# Altium PCB Ryu-Mount.PcbDoc
Units mil, origin at the board's own origin, x right, y up, seen from the top; angles counter-clockwise.
Board outline 6020 x 4528.86 mil, 2 copper layers (Top Layer, Bottom Layer); 5 components, 0 nets, 5 pads, 0 vias.
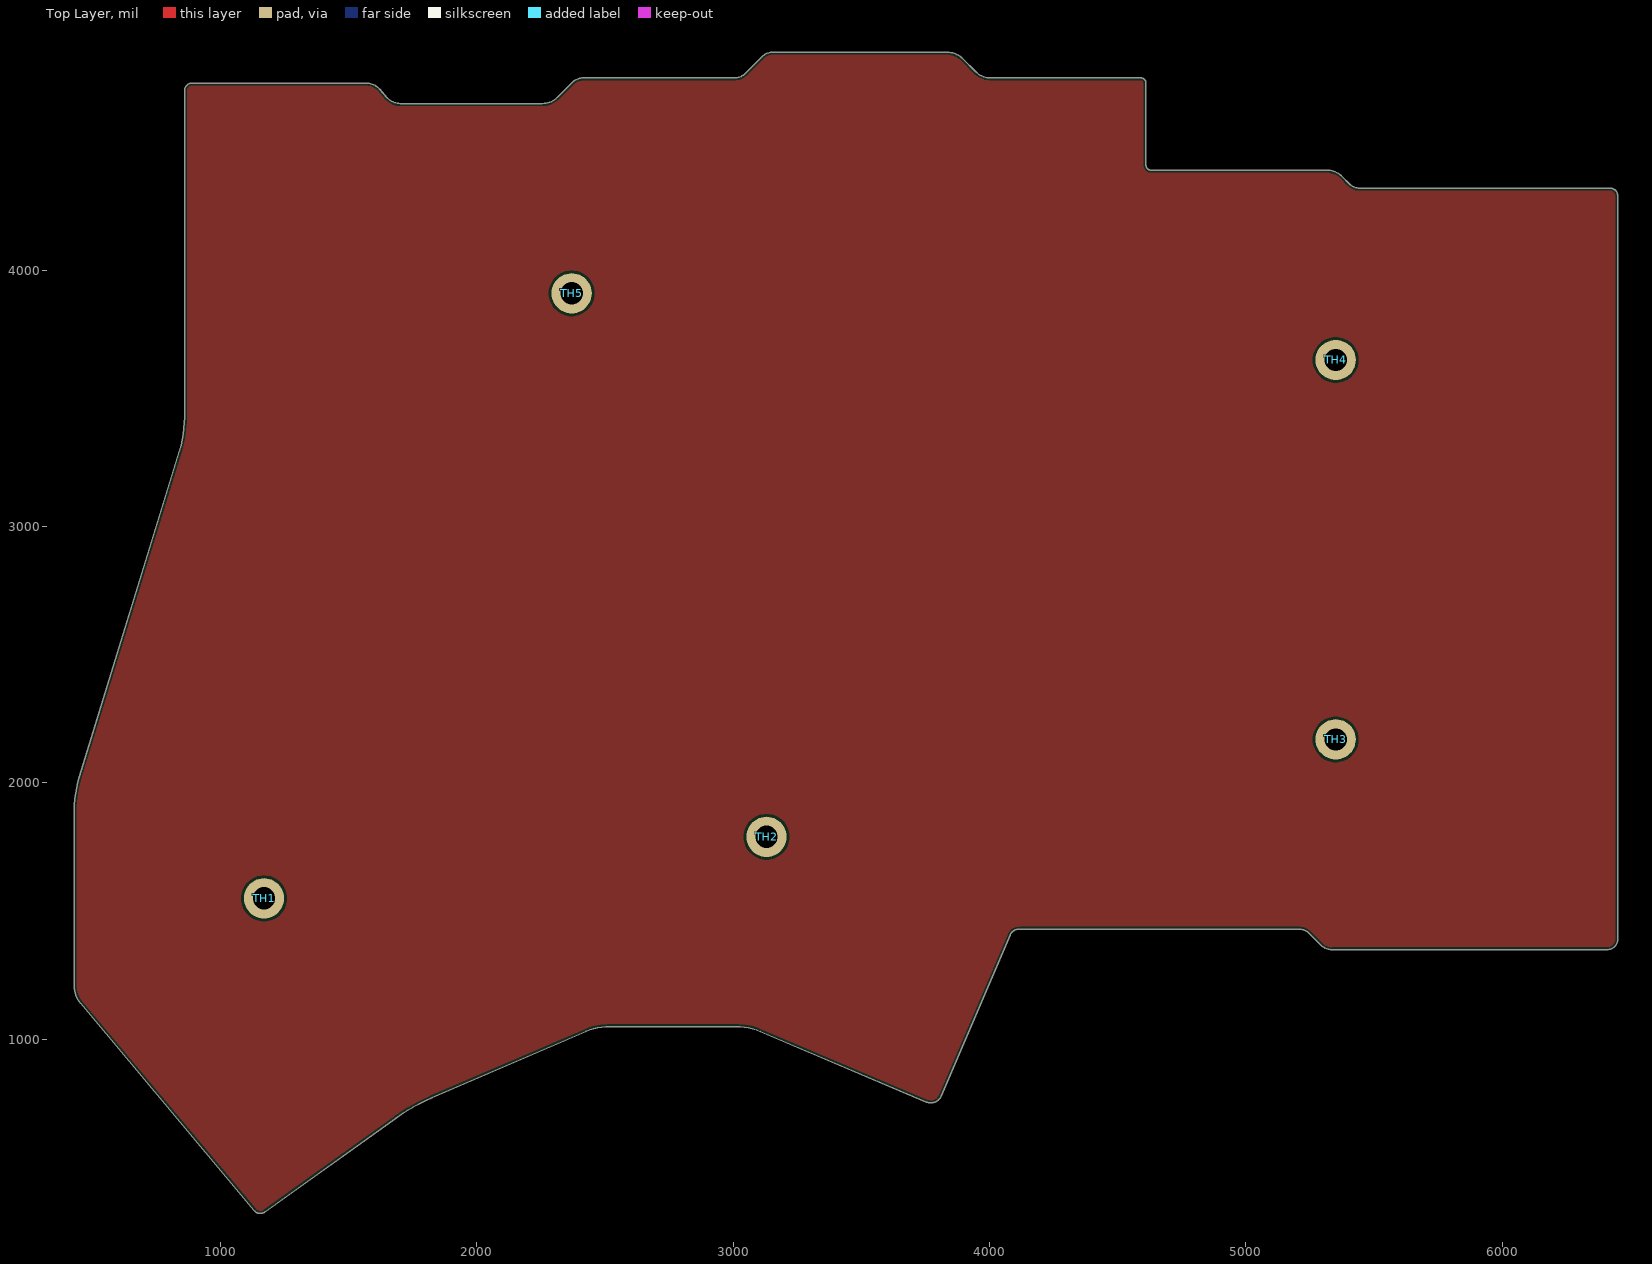
[diagram p0: Top Layer view]
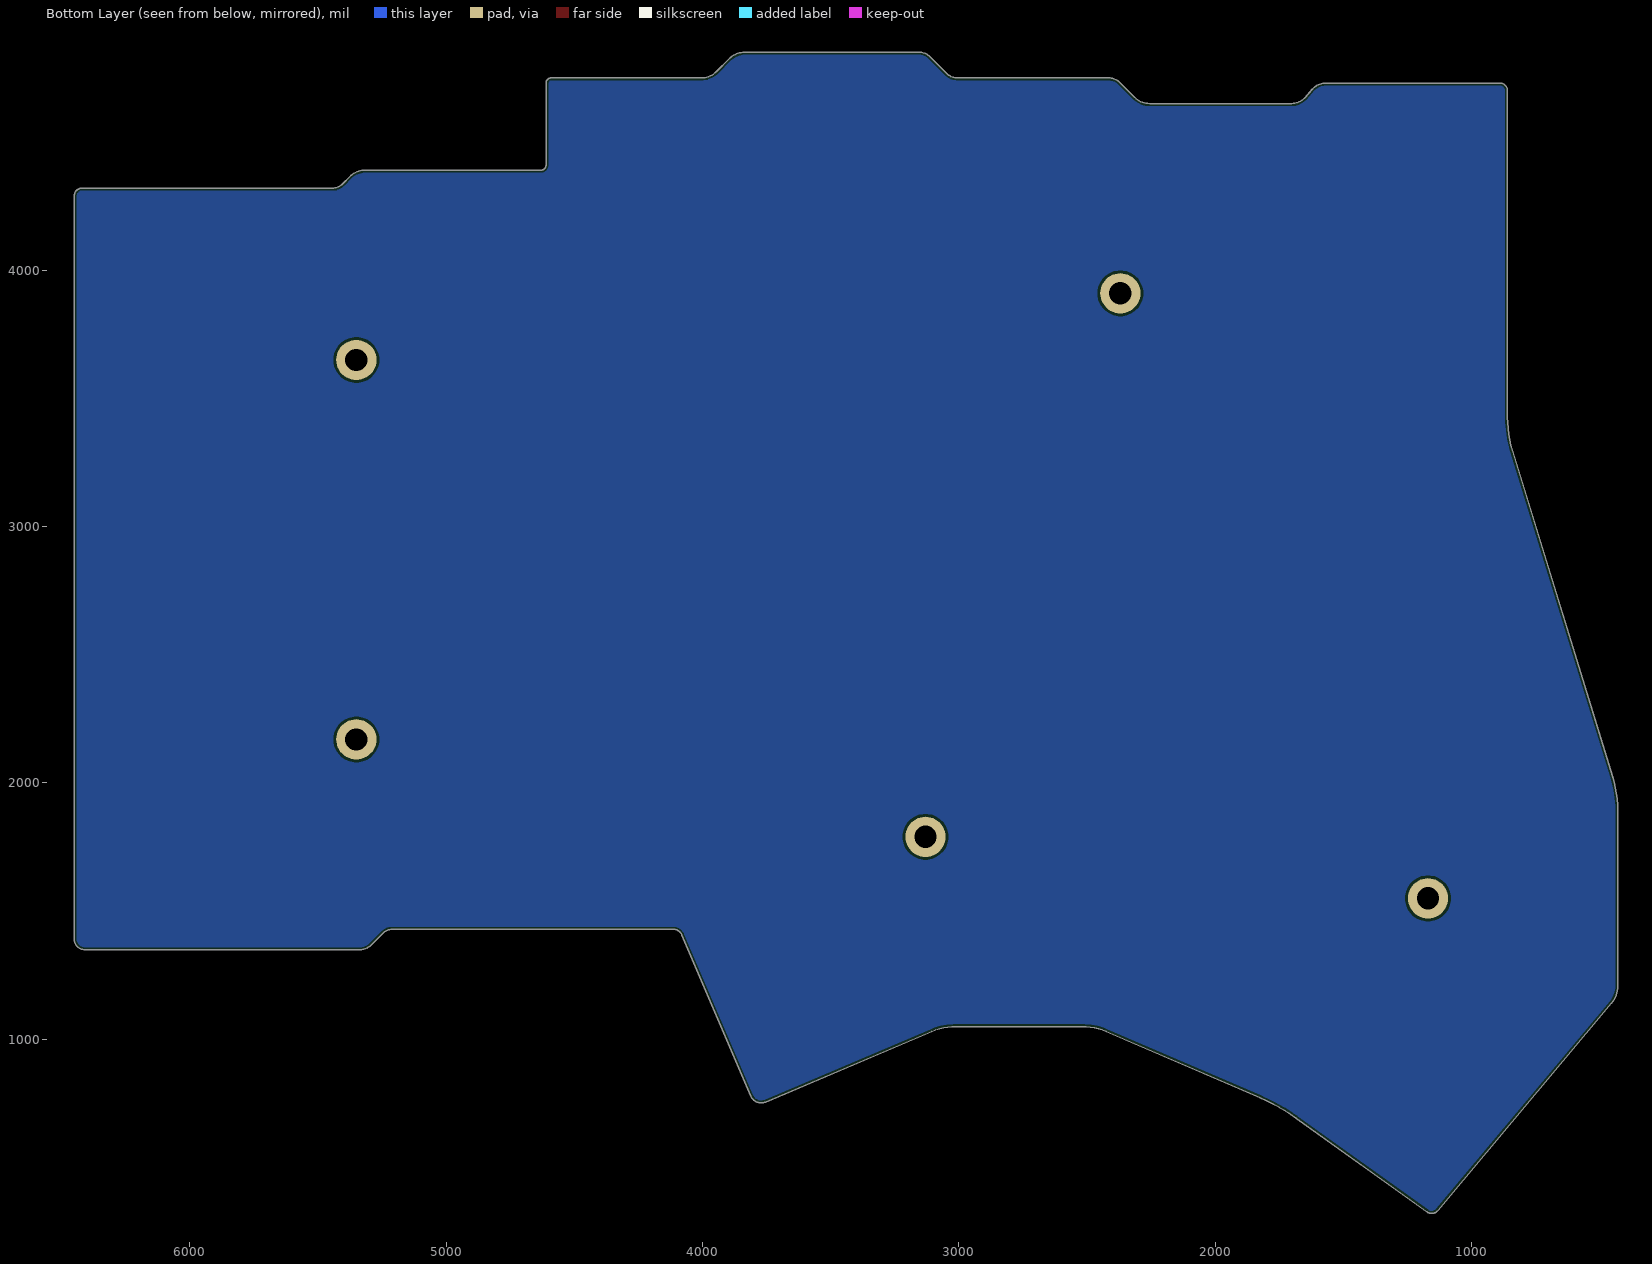
[diagram p1: Bottom Layer view, seen from below]

## Layer stack, top to bottom
Top Solder: solder mask 0.4, Solder Resist, Dk 3.5
Top Layer: signal copper 1.4
Dielectric 1: dielectric 12.6, FR-4, Dk 4.8
Bottom Layer: signal copper 1.4
Bottom Solder: solder mask 0.4, Solder Resist, Dk 3.5

## Board outline
430,1207.52 430,1893.38 cw(c873.78,1893.38) 449.56,2023.68 840.44,3296.32 ccw(c416.26,3426.61) 860,3426.62 860,4700 cw(c890,4700) 890,4730 1567.96,4730 cw(c1567.96,4659.4) 1621.1,4705.89 1648.9,4674.11 ccw(c1702.04,4720.6) 1702.04,4650 2255.86,4650 ccw(c2255.86,4732.42) 2314.14,4674.14 2372.93,4732.93 cw(c2414.14,4691.72) 2414.14,4750 3005.86,4750 ccw(c3005.86,4808.28) 3047.07,4767.07 3112.93,4832.93 cw(c3154.14,4791.72) 3154.14,4850 3835.86,4850 cw(c3835.86,4767.59) 3894.14,4825.86 3945.86,4774.14 ccw(c4004.14,4832.43) 4004.14,4750 4590,4750 cw(c4590,4730) 4610,4730 4610,4410 ccw(c4630,4410) 4630,4390 5315.86,4390 cw(c5315.86,4307.6) 5374.14,4365.85 5374.14,4365.86 5402.93,4337.07 ccw(c5444.14,4378.29) 5444.14,4320 6420,4320 cw(c6420,4290) 6450,4290 6450,1390 cw(c6410,1389.99) 6410,1350 5334.14,1350 cw(c5334.14,1408.28) 5292.93,1367.07 5247.07,1412.93 ccw(c5205.88,1371.75) 5205.86,1430 4620,1430 4115.16,1430 ccw(c4115.16,1391.85) 4080.09,1406.87 3810.75,778.34 cw(c3770.71,795.49) 3753.67,755.4 3105.22,1030.8 ccw(c3010.87,808.65) 3010.87,1050 2518.51,1050 ccw(c2518.51,814.66) 2425.44,1030.81 2425.44,1030.82 1824.45,772.05 ccw(c2121.1,83.05) 1684.12,692.78 1173.72,327 cw(c1155.39,352.57) 1131.27,332.37 454.09,1141.23 cw(c533.27,1207.52)

## Design rules (kind name [scope] priority, off if disabled: settings)
BoardOutlineClearance [All] p1: gap=10 ignorepadtopadclearanceinfootprint=FALSE except(0: Arc-SplitContinuation Track-SplitContinuation SMDPad-SplitContinuation THPad-SplitContinuation Via-SplitContinuation Fill-SplitContinuation Poly-SplitContinuation Region-SplitContinuation Text-SplitContinuation)
Clearance [All] p1: gap=10 ignorepadtopadclearanceinfootprint=FALSE except(0: Arc-Hole Track-Hole SMDPad-Hole THPad-Hole Via-Hole Fill-Hole Poly-Hole Region-Hole Text-Hole)
PolygonConnect [All] p1: connectstyle=Relief reliefconductorwidth=10 reliefentries=4 polygonreliefangle="90 Angle" airgapwidth=10
RoutingVias [All] p1: holewidth=28 width=50 viastyle="Through Hole" minholewidth=28 minwidth=50 maxholewidth=28 maxwidth=50
SolderMaskExpansion [All] p1: expansion=4 istentingtop=FALSE
Width [All] p1: maxlimit=10 minlimit=10 preferedwidth=10
30 further rules are at their usual default settings.

## Components (designator, comment, footprint, x,y, rotation, side; value= is the part's Value field where it differs from the comment)
TH1 "HOLE_PCB" M2_PCB_HOLE#1 2620,2960 r0 top
TH2 "HOLE_PCB" M2_PCB_HOLE#2 2835,2960 r0 top
TH3 "HOLE_PCB" M2_PCB_HOLE#3 3065,2960 r0 top
TH4 "HOLE_PCB" M2_PCB_HOLE#4 3295,2960 r0 top
TH5 "HOLE_PCB" M2_PCB_HOLE#5 3525,2960 r0 top

## Footprints (in the part's own frame and the unit in brackets; to place one, negate y for a bottom-side part, rotate by r counter-clockwise, add the part's x,y. Pads: shape width x height; smd on the part's side, far side on the other; paste and mask are expansions set on the pad)
M2_PCB_HOLE#1 [mm]
  round 4 hole 2.2: ""(-36.83,-35.814)
M2_PCB_HOLE#2 [mm]
  round 4 hole 2.2: ""(7.493,-29.718)
M2_PCB_HOLE#3 [mm]
  round 4 hole 2.2: ""(58.039,-20.066)
M2_PCB_HOLE#4 [mm]
  round 4 hole 2.2: ""(52.197,17.526)
M2_PCB_HOLE#5 [mm]
  round 4 hole 2.2: ""(-29.337,24.13)

## Nets (pads, with @x,y where several pads share a name; then routed paths per layer and width w, separated by ;. In a path a pad name is that pad's centre, name@x,y a point inside that pad or via, vN(x,y) a via of type N, cw(c..) or ccw(c..) an arc to the next point about the centre after c; other vN are vias at no path point)
pads on no net: TH1. TH2. TH3. TH4. TH5.

## Polygon pours and split planes (outlines as drawn)
no net on Top Layer "NONET_L-01_P-001" (solid, pour order 0): 225,4970 270,5015 6685,5015 6685,45 6605,125 125,125
no net on Bottom Layer "NONET_L-01_P-001" (solid, pour order 1): 180,5150 6675,5150 6595,5070 6595,85 180,85 170,75

## Silkscreen, mask and mechanical layers (free items; w line width, h text height)
Board Shape:
  the board outline again, w0